# Altium PCB Powerboard_SAUVC26.PcbDoc (part 1 of 2)
Units mm, origin at the board's own origin, x right, y up, seen from the top; angles counter-clockwise.
Board outline 106 x 105.68 mm, 4 copper layers (Top Layer, Layer 1, Layer 2, Bottom Layer), stack 2.288 mm thick; 93 components, 65 nets, 427 pads, 430 vias.
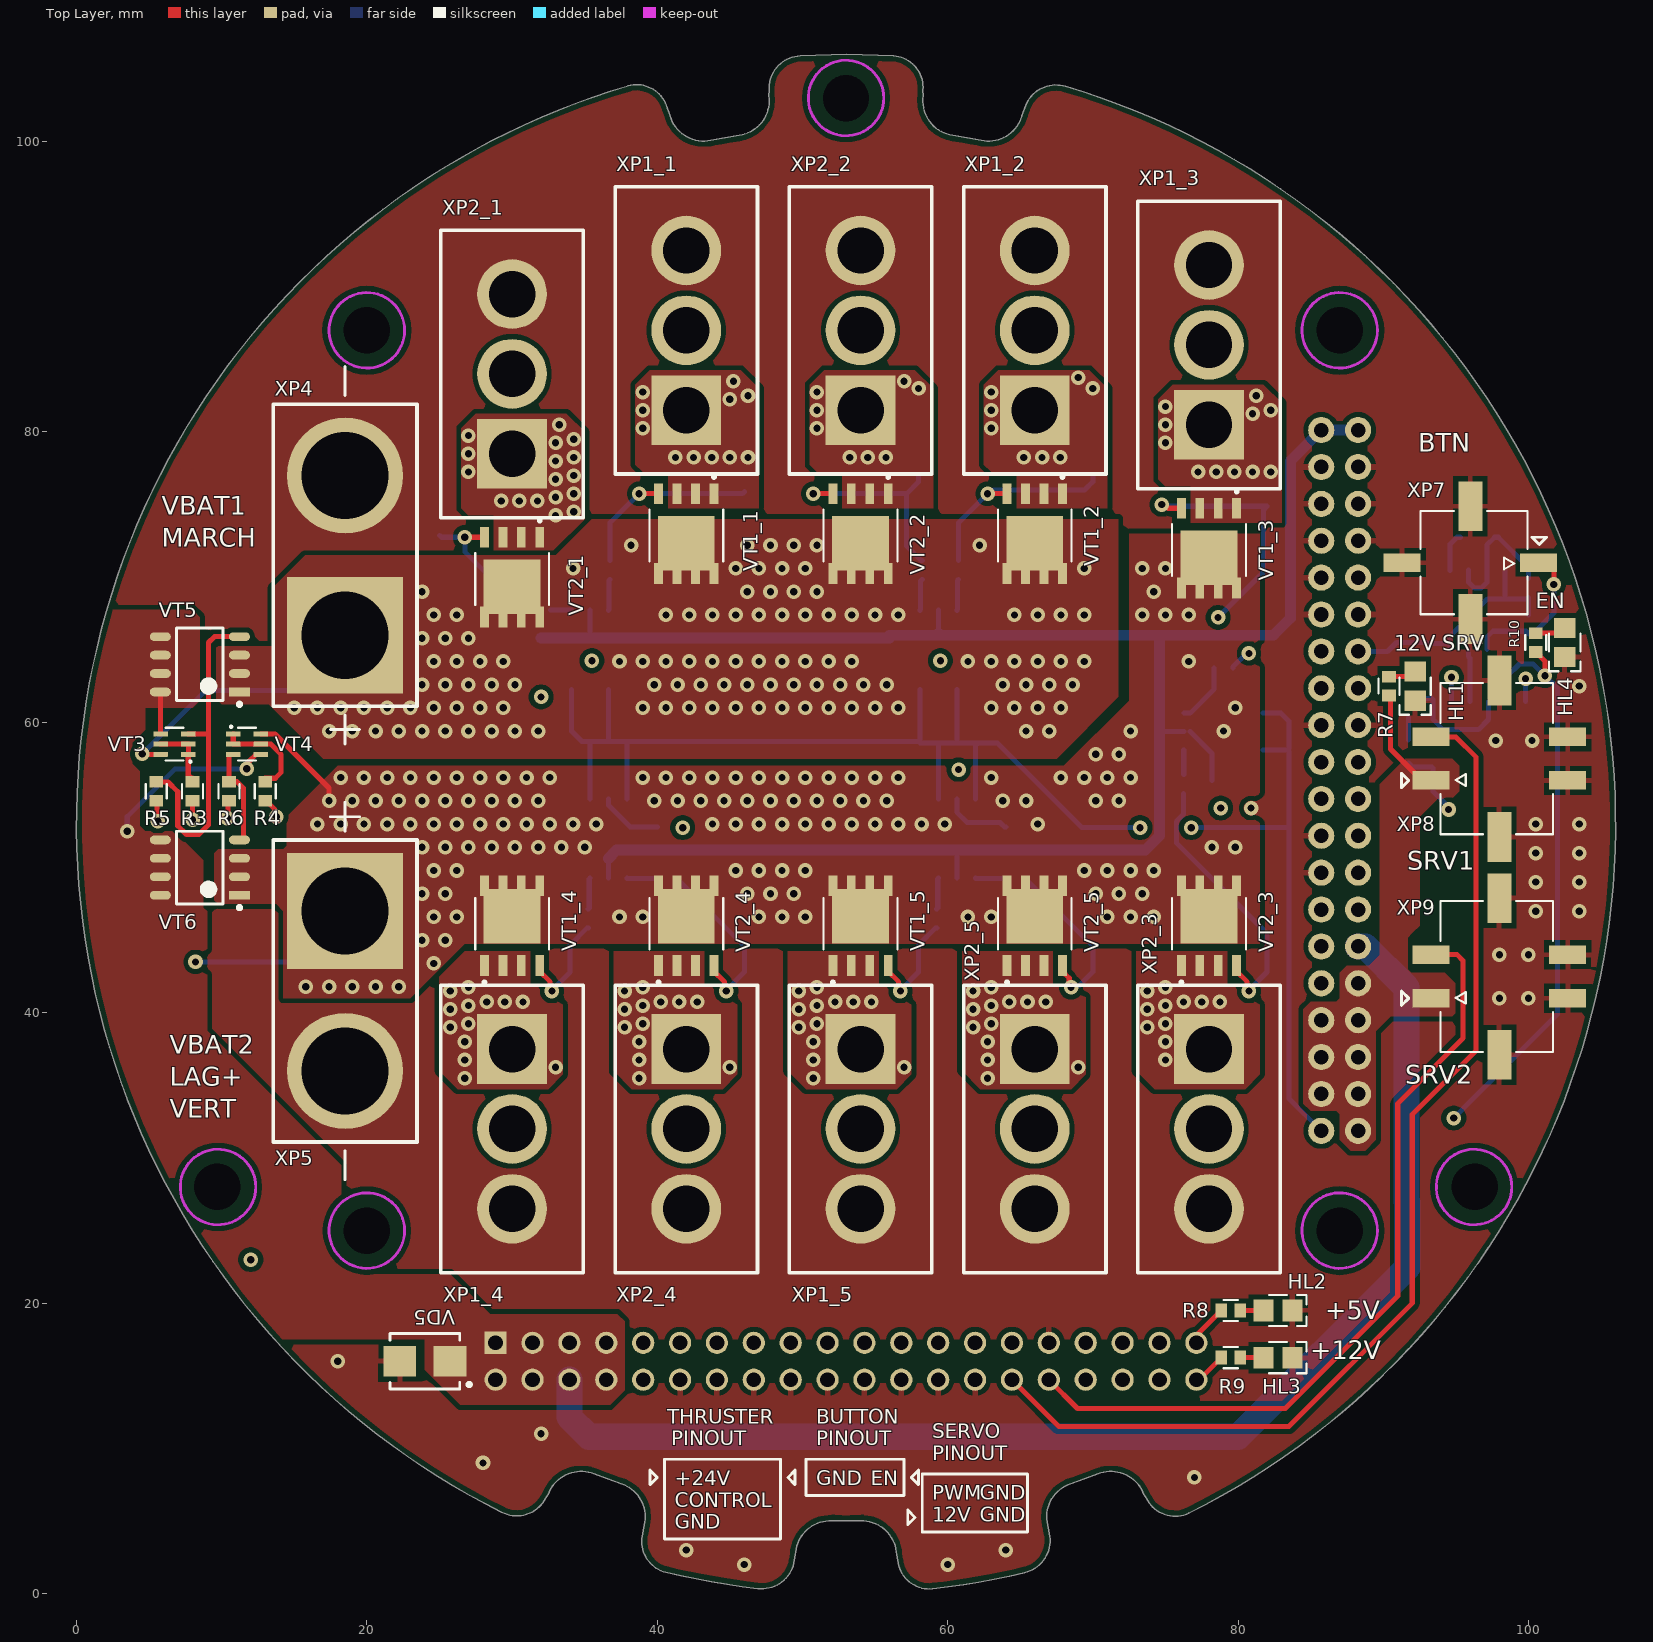
[diagram p0: Top Layer view]
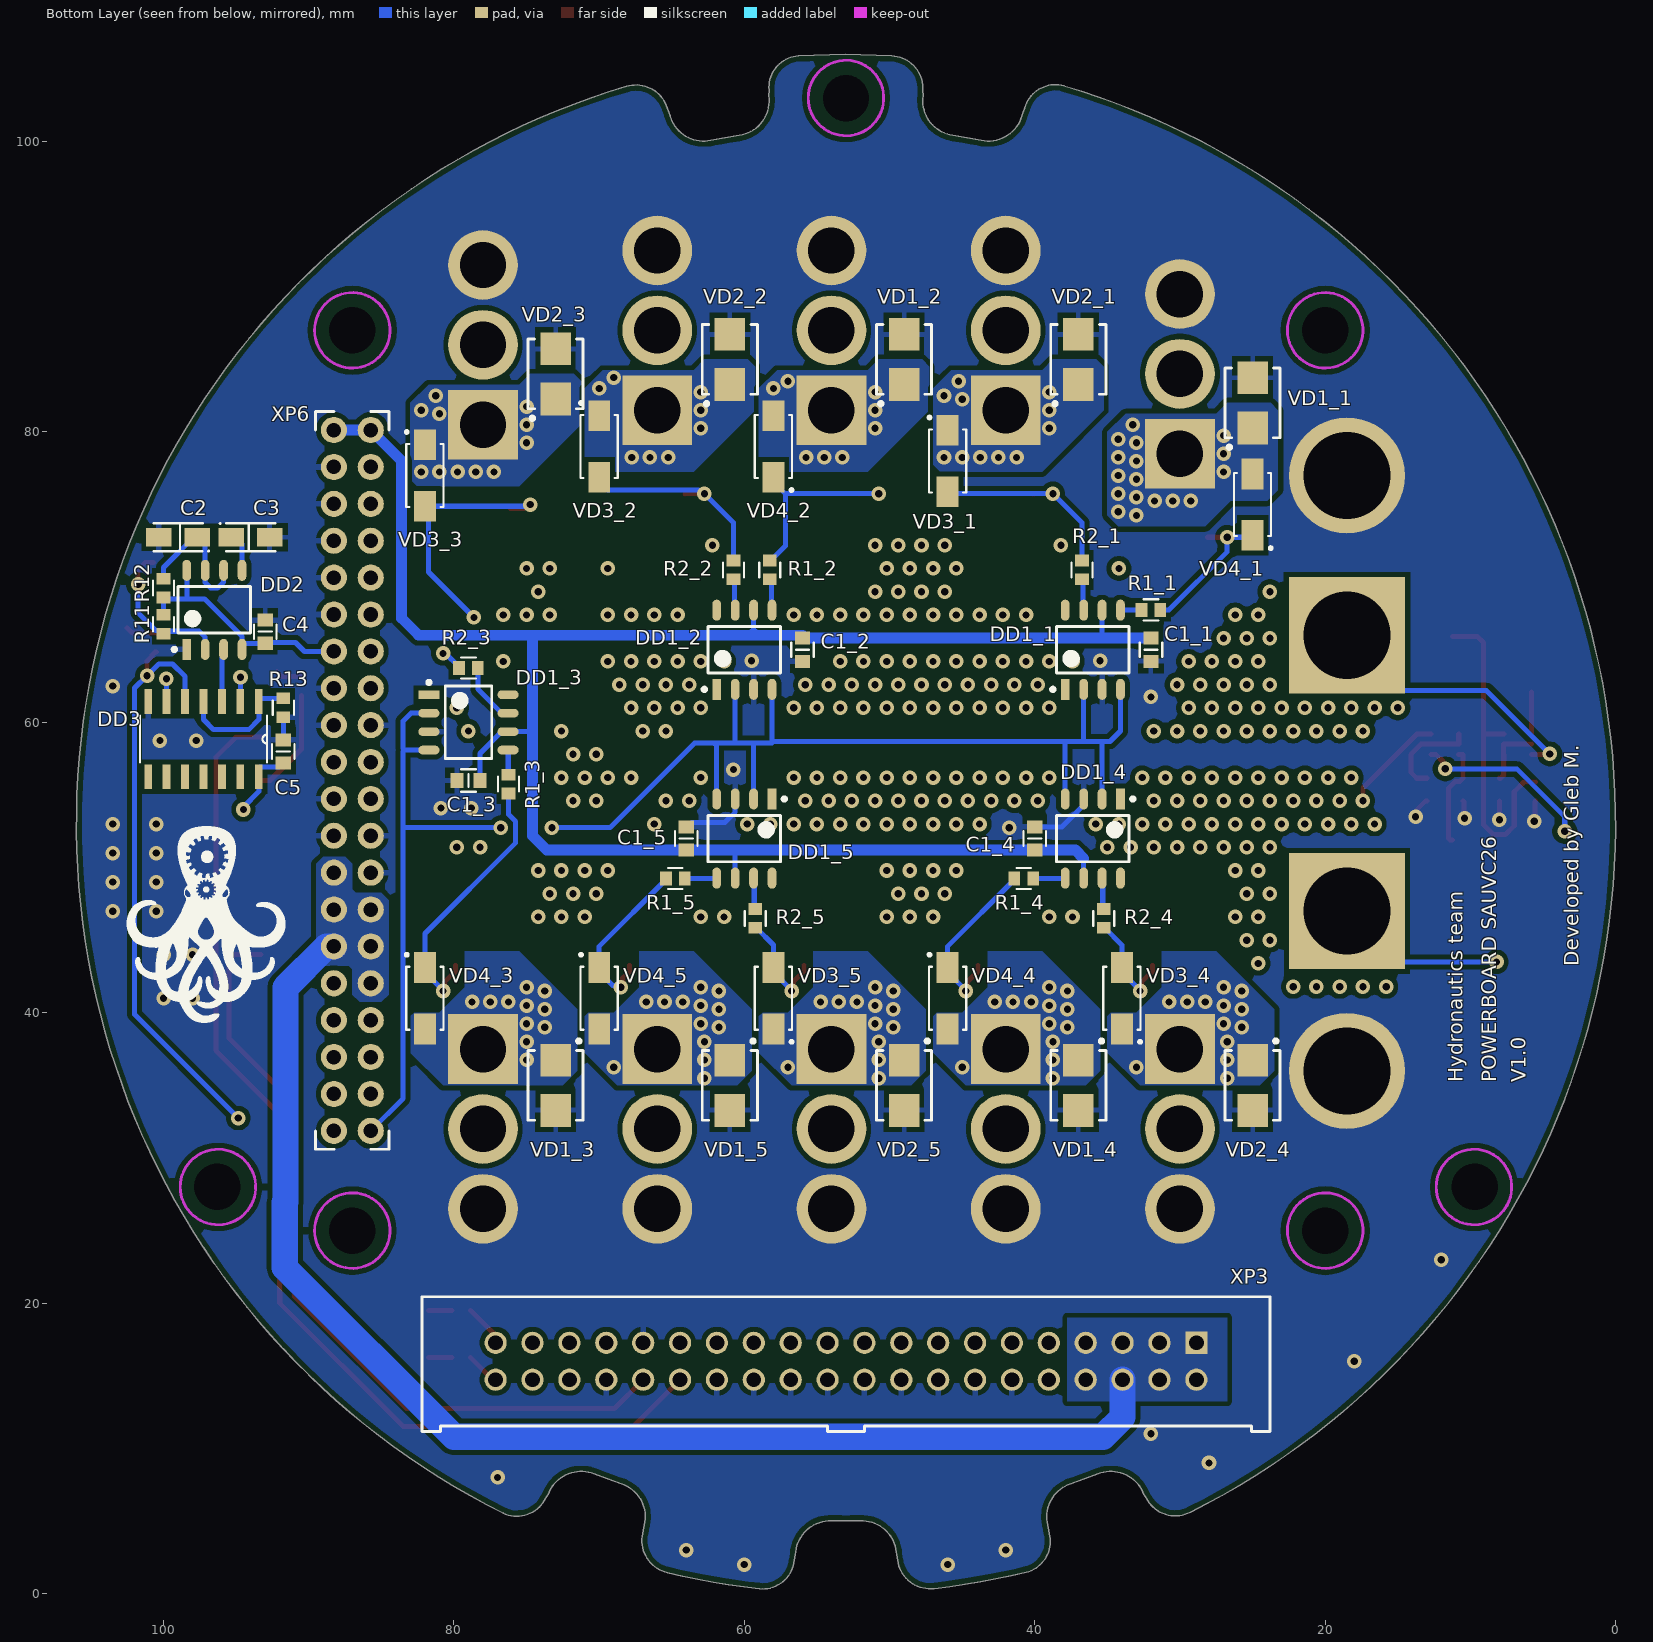
[diagram p1: Bottom Layer view, seen from below]
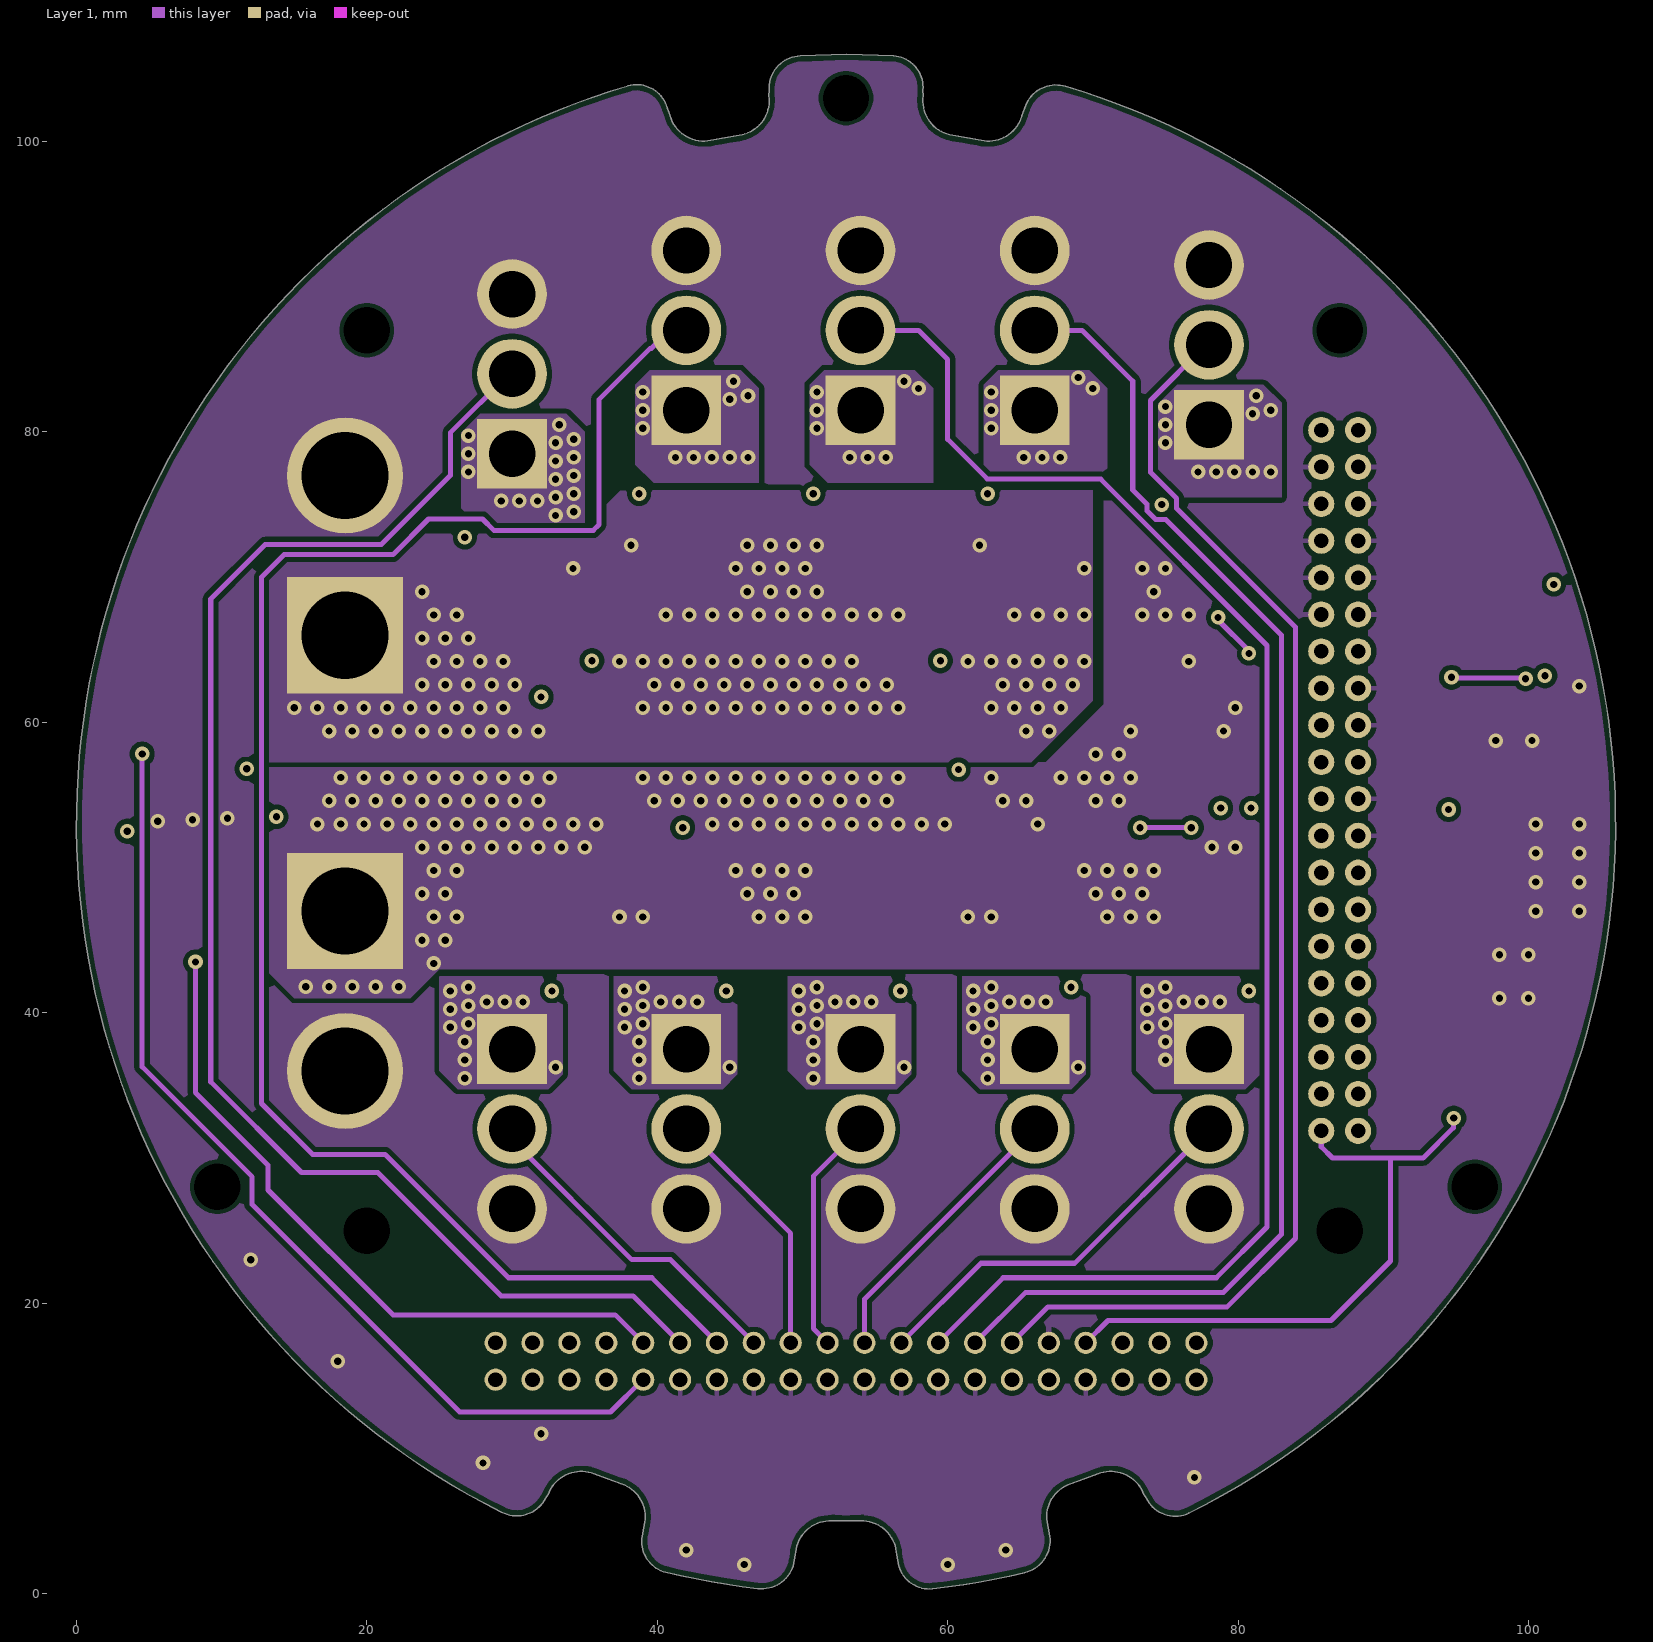
[diagram p2: Layer 1]
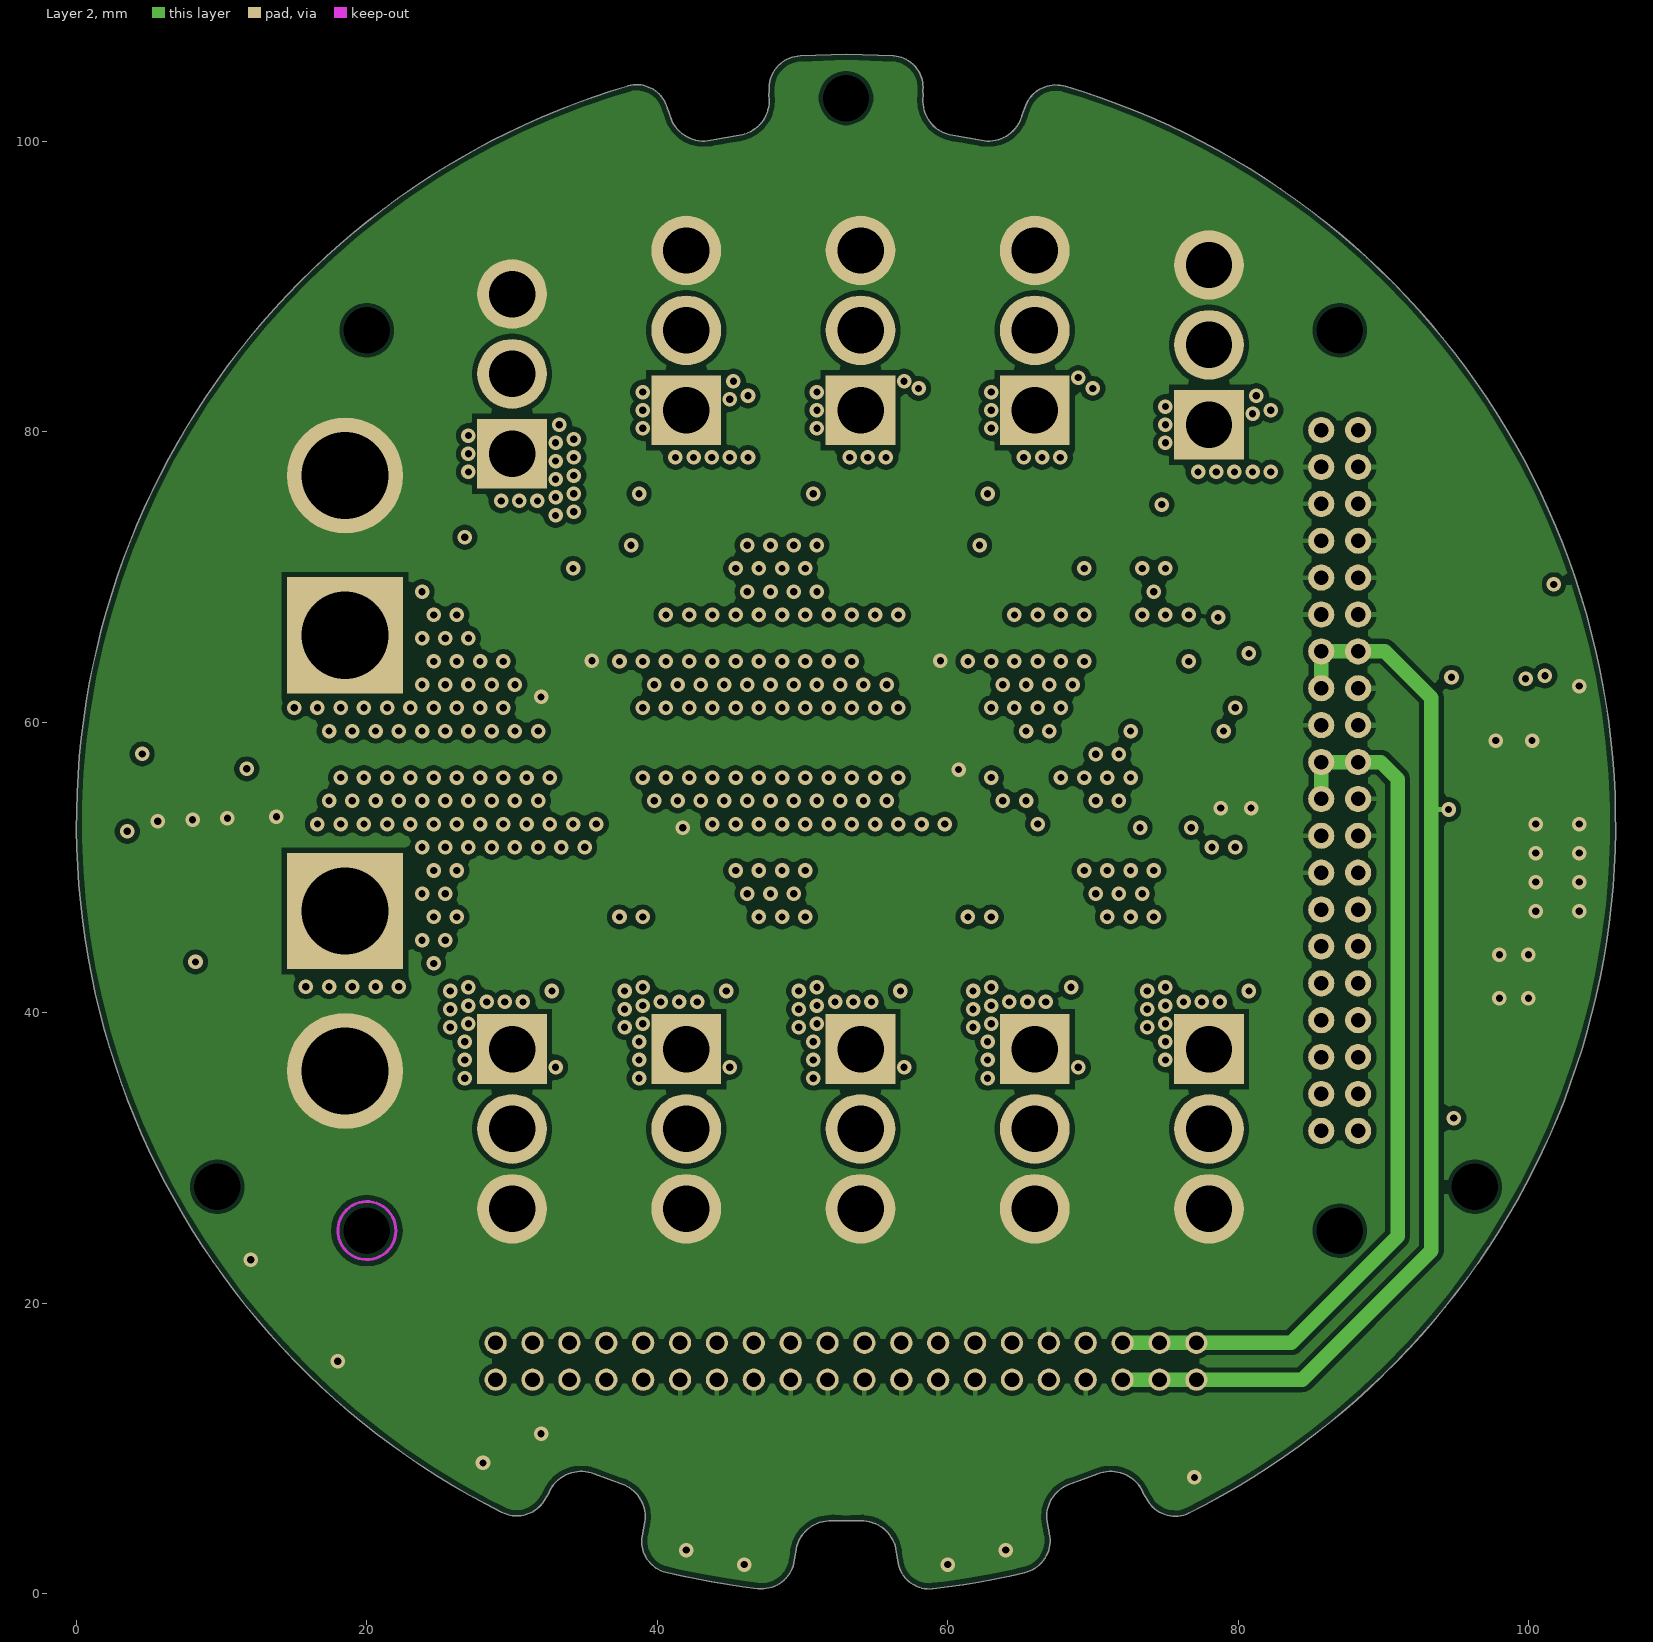
[diagram p3: Layer 2]
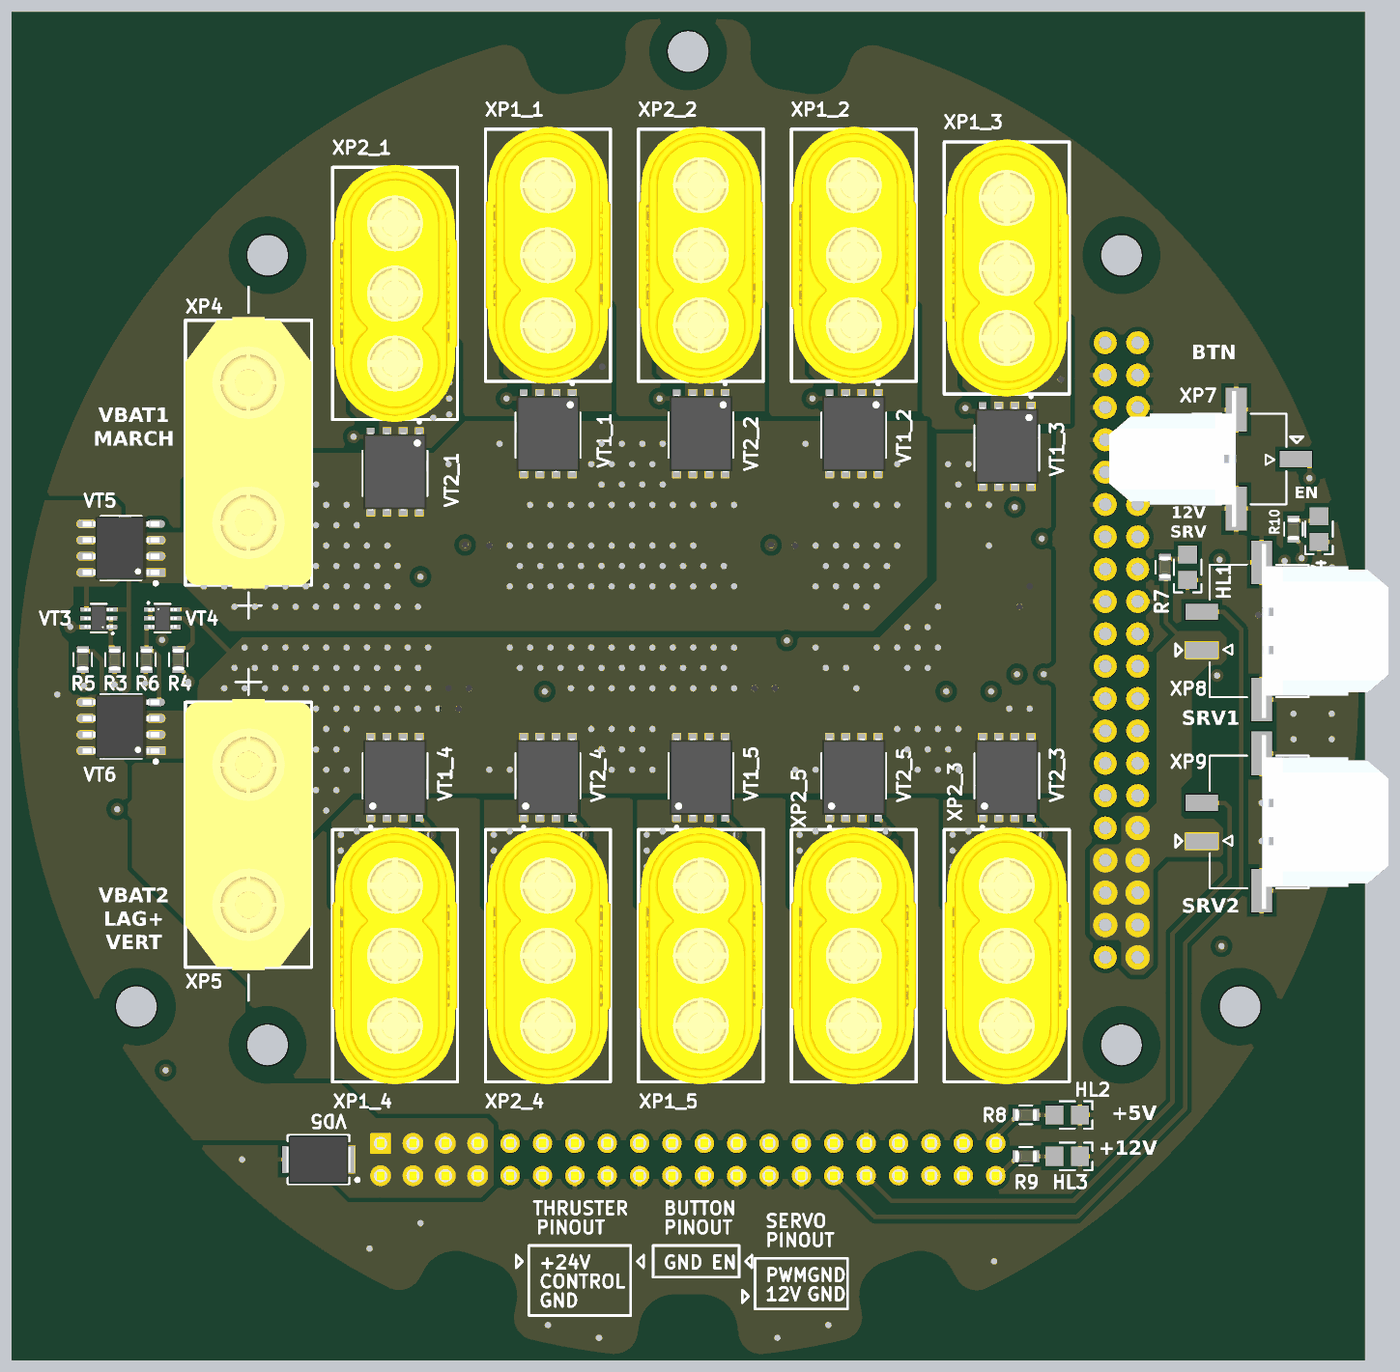
[diagram p5: 3D render of the assembled board from above, using the file's embedded part models]
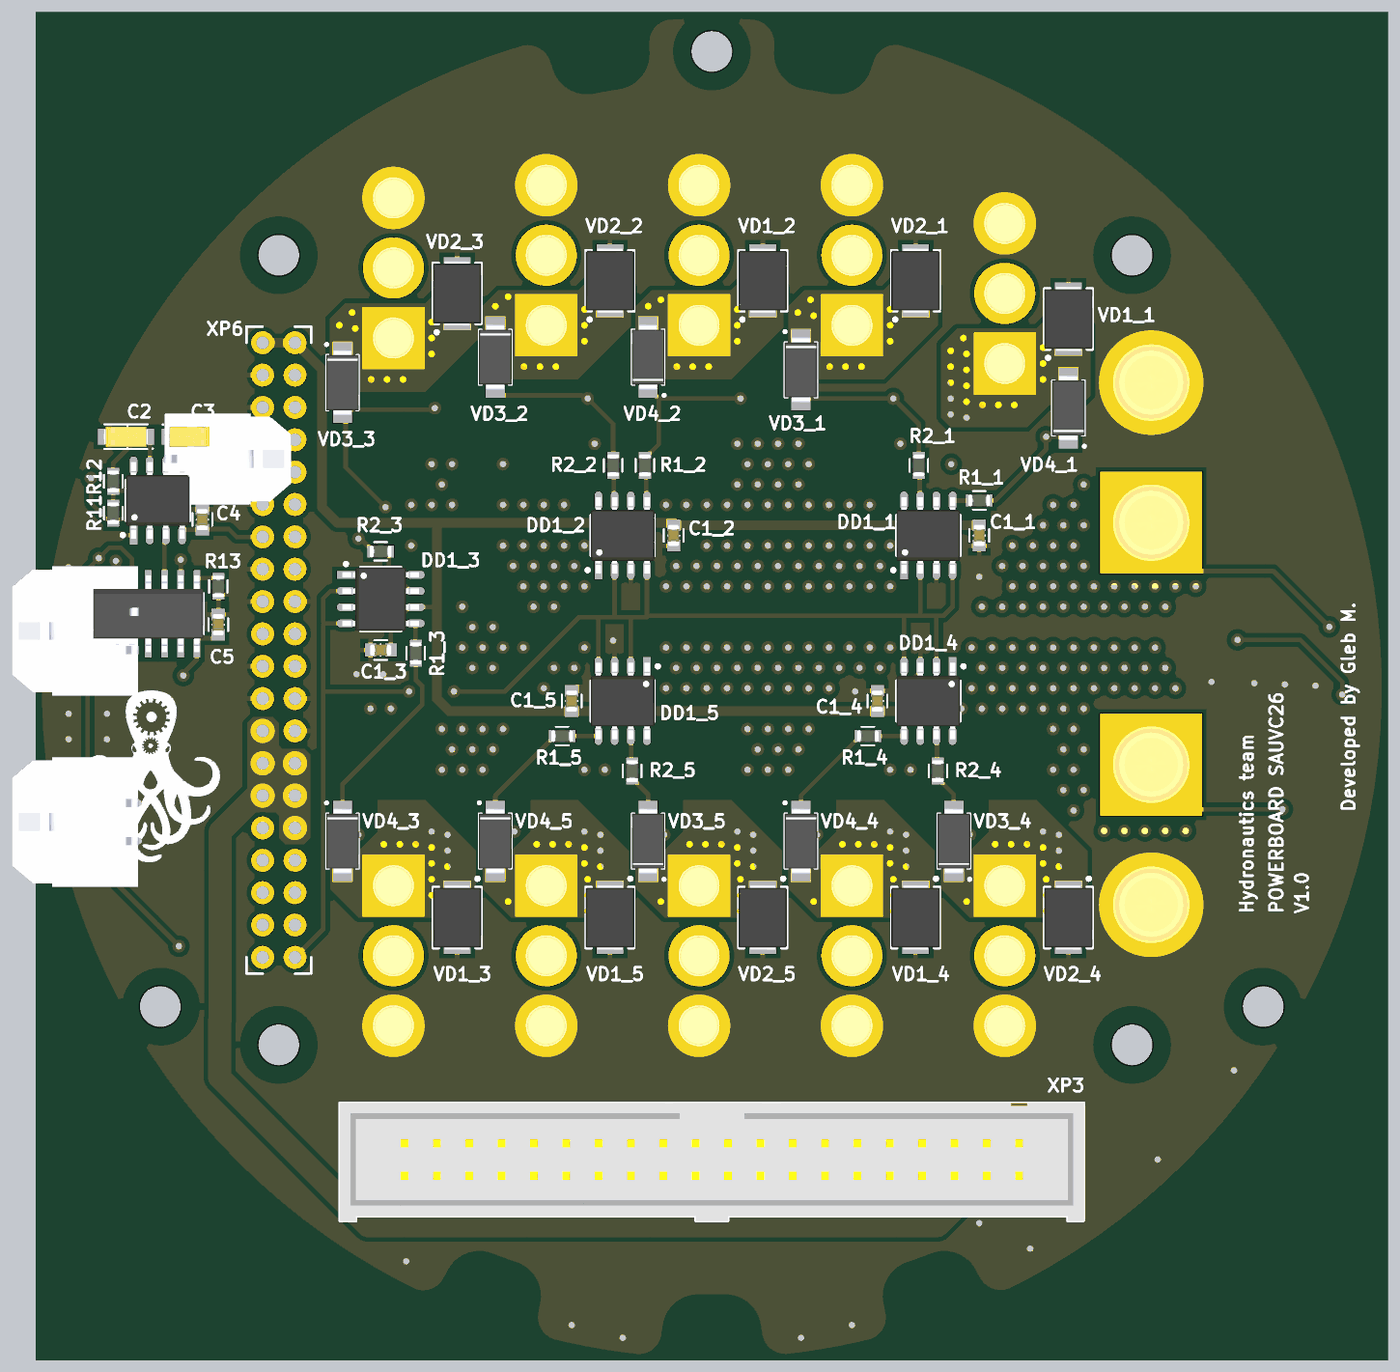
[diagram p6: 3D render of the assembled board from below, using the file's embedded part models]

## Layer stack, top to bottom
Top Solder: solder mask 0.0102, Solder Resist, Dk 3.5
Top Layer: signal copper 0.105
Dielectric 4: prepreg 0.193, FR4, Dk 4.6
Dielectric 6: prepreg 0.193, FR4, Dk 4.6
Dielectric 2: prepreg 0.193, FR4, Dk 4.6
Layer 1: signal copper 0.105
Dielectric 1: core 0.71, FR4, Dk 4.6
Layer 2: signal copper 0.105
Dielectric 3: prepreg 0.193, FR4, Dk 4.6
Dielectric 7: prepreg 0.193, FR4, Dk 4.6
Dielectric 5: prepreg 0.193, FR4, Dk 4.6
Bottom Layer: signal copper 0.105
Bottom Solder: solder mask 0.0102, Solder Resist, Dk 3.5

## Board outline
29.284,5.602 ccw(c30.316,7.601) 32.315,6.569 32.52,6.906 cw(c34.754,6.013) 35.647,8.246 ccw(c53.002,53.005) 37.526,7.563 cw(c36.774,5.278) 39.059,4.526 39,4.137 ccw(c41.13,3.594) 40.588,1.464 40.59,1.473 ccw(c53,53) 46.925,0.349 ccw(c47.211,2.581) 49.443,2.294 49.521,2.681 cw(c51.925,2.606) 52,5.01 ccw(c53,52.997) 54,5.01 cw(c54.075,2.606) 56.479,2.681 56.556,2.295 ccw(c58.744,2.514) 58.963,0.327 58.962,0.336 ccw(c53,53) 65.299,1.447 ccw(c64.805,3.642) 67,4.136 66.94,4.526 cw(c69.226,5.277) 68.474,7.563 ccw(c53,53.001) 70.353,8.246 cw(c71.246,6.013) 73.479,6.906 73.684,6.569 ccw(c75.665,7.523) 76.619,5.543 76.614,5.551 ccw(c53,53) 68.125,103.796 ccw(c67.456,101.648) 65.308,102.318 65.164,101.95 cw(c62.81,102.442) 62.318,100.087 ccw(c53.001,53.005) 60.349,100.434 cw(c60.692,102.815) 58.312,103.158 58.302,103.552 ccw(c56.11,103.716) 56.274,105.908 56.274,105.899 ccw(c53,53.001) 49.84,105.906 ccw(c49.946,103.658) 47.698,103.553 47.689,103.159 cw(c45.308,102.815) 45.651,100.434 ccw(c52.999,53.004) 43.682,100.087 cw(c43.191,102.441) 40.836,101.95 40.693,102.317 ccw(c38.577,101.721) 37.981,103.837 37.984,103.828 ccw(c53,53)

## Design rules (kind name [scope] priority, off if disabled: settings)
AcuteAngle [All] p1: minimum=3.50000000000000E+0001 checktracksonly=FALSE
BoardOutlineClearance "BoardOutlineClearance 2" [All] p1: gap=0.4 ignorepadtopadclearanceinfootprint=FALSE except(0: Arc-SplitContinuation Track-SplitContinuation SMDPad-SplitContinuation THPad-SplitContinuation Via-SplitContinuation Fill-SplitContinuation Poly-SplitContinuation Region-SplitContinuation Text-SplitContinuation) // V-Cut
Clearance "Clearance 3 Oz" [All] p1: gap=0.35 ignorepadtopadclearanceinfootprint=FALSE except(0.26: Arc-Hole Track-Hole SMDPad-Hole THPad-Hole Via-Hole Fill-Hole Poly-Hole Region-Hole Text-Hole)
HoleSize "Minimum HoleSize" [IsPad] p1: absolutevalues=TRUE maxlimit=8 minlimit=0.6 maxpercent=80.000 minpercent=20.000
HoleSize "Minimum HoleSize VIA 1" [IsVia] p2: absolutevalues=TRUE maxlimit=5.9 minlimit=0.3 maxpercent=80.000 minpercent=20.000 // Standart
HoleToHoleClearance Hole2HoleClearance [All] p1: gap=0.25 allowstackedmicrovias=FALSE
MinimumAnnularRing "Minimum AR VIA Standart" [IsVia] p1: minimumring=0.15
MinimumAnnularRing "Minimum AR PAD Standart" [IsPAD] p2: minimumring=0.2
MinimumAnnularRing "Minimum AR VIA Advance" [IsVia] p3: minimumring=0.1
MinimumAnnularRing "Minimum AR PAD Advance" [IsPAD] p4: minimumring=0.15
MinimumSolderMaskSliver "SolderMask Bridge Standart" [All] p1: minsoldermaskwidth=0.15 // All Masks
PlaneClearance "PlaneClearance 3 Oz" [All] p1: clearance=0.35
PlaneConnect "TermalConnect 3 Oz" [All] p1: planeconnectstyle=Relief reliefexpansion=0.2 reliefentries=4 reliefconductorwidth=0.35 reliefairgap=0.35 // Standart
PolygonConnect Thermal_relief [InNet('GND')] p1: thpad.connectstyle=Relief thpad.reliefconductorwidth=0.35 thpad.reliefentries=4 thpad.polygonreliefangle="90 Angle" thpad.airgapwidth=0.35 smdpad.connectstyle=Relief smdpad.reliefconductorwidth=0.35 smdpad.reliefentries=4 smdpad.polygonreliefangle="90 Angle" smdpad.airgapwidth=0.35 via.connectstyle=Direct via.reliefconductorwidth=0.254 via.reliefentries=4 via.polygonreliefangle="90 Angle" via.airgapwidth=0.254
PolygonConnect Direct [All] p2: connectstyle=Direct reliefconductorwidth=0.254 reliefentries=4 polygonreliefangle="90 Angle" airgapwidth=0.254
RoutingCorners [All] p1 off: cornerstyle=45-Degree minsetback=2.54 maxsetback=2.54
RoutingVias [All] p1: holewidth=0.5 width=1 viastyle="Through Hole" minholewidth=0.3 minwidth=0.6 maxholewidth=8 maxwidth=7
SilkToSilkClearance Silk2SilkClearance [All] p1 off: silktosilkclearance=0.15
SilkToSolderMaskClearance Silk2SolderMaskClearance [IsPad] p1: minsilkscreentomaskgap=0.15 clearancetoexposedcopper=TRUE
SolderMaskExpansion "SolderMaskExpansion LDI" [IsVia] p1: expansion=0.025 istentingtop=TRUE // Advance
SolderMaskExpansion [All] p2: expansion=0.05 istentingtop=FALSE
SupplyNets "Schematic Supply Nets_10" [InNet('+16В_АКБ2')] p1: voltage=0.000
SupplyNets "Schematic Supply Nets_9" [InNet('+16В')] p2: voltage=0.000
SupplyNets "Schematic Supply Nets_8" [InNet('+16В_АКБ1')] p3: voltage=0.000
SupplyNets "Schematic Supply Nets_7" [InNet('GND')] p4: voltage=0.000
SupplyNets "Schematic Supply Nets_5" [InNet('+5В')] p5: voltage=0.000
SupplyNets "Schematic Supply Nets_4" [InNet('+12В_servo')] p6: voltage=0.000
SupplyNets "Schematic Supply Nets_1" [InNet('+12В')] p7: voltage=0.000
SupplyNets "Schematic Supply Nets" [InNet('+35В')] p8: voltage=0.000
UnRoutedNet [All] p1: checkbadconnections=TRUE
Width "Width 3 Oz" [All] p1: maxlimit=10 minlimit=0.35 preferedwidth=0.4 checkconnectedcopper=TRUE
21 further rules are at their usual default settings.

## Classes and differential pairs
component class 3: C1_3 DD1_3 R1_3 R2_3 VD1_3 VD2_3 VD3_3 VD4_3 VT1_3 VT2_3 XP1_3 XP2_3
net class DSHOT2_[1..5]: DSHOT2_1 DSHOT2_2 DSHOT2_3 DSHOT2_4 DSHOT2_5
net class DSHOT1_[1..5]: DSHOT1_1 DSHOT1_2 DSHOT1_3 DSHOT1_4 DSHOT1_5
channel class Transistors: 1 2 3 4 5
component class 5: C1_5 DD1_5 R1_5 R2_5 VD1_5 VD2_5 VD3_5 VD4_5 VT1_5 VT2_5 XP1_5 XP2_5
component class 4: C1_4 DD1_4 R1_4 R2_4 VD1_4 VD2_4 VD3_4 VD4_4 VT1_4 VT2_4 XP1_4 XP2_4
component class 2: C1_2 DD1_2 R1_2 R2_2 VD1_2 VD2_2 VD3_2 VD4_2 VT1_2 VT2_2 XP1_2 XP2_2
component class 1: C1_1 DD1_1 R1_1 R2_1 VD1_1 VD2_1 VD3_1 VD4_1 VT1_1 VT2_1 XP1_1 XP2_1
component class KillSwitch: C2 C3 C4 C5 DD2 DD3 R11 R12 R13
component class Connectors: 32 HL1 HL2 HL3 HL4 R3 R4 R5 R6 R7 R8 R9 R10 VD5 VT3 VT4 VT5 VT6 XP3 XP4 XP5 XP6 XP7 XP8 XP9

## Components (designator, comment, footprint, x,y, rotation, side; value= is the part's Value field where it differs from the comment)
C1_1 "Capacitor" 0603C 32,65 r90 bottom value="0,1 мк" (schematic designator C1)
C1_2 "Capacitor" 0603C 56,65 r90 bottom value="0,1 мк" (schematic designator C1)
C1_3 "Capacitor" 0603C 79,56 r180 bottom value="0,1 мк" (schematic designator C1)
C1_4 "Capacitor" 0603C 40,52 r270 bottom value="0,1 мк" (schematic designator C1)
C1_5 "Capacitor" 0603C 64,52 r270 bottom value="0,1 мк" (schematic designator C1)
C2 "Capacitor" TC_A 99,72.75 r0 bottom value="22 мк"
C3 "Capacitor" TC_A 94,72.75 r180 bottom value="10 мк"
C4 "Capacitor" 0603C 93,66.25 r270 bottom value="0,1 мк"
C5 "Capacitor" 0603C 91.75,58 r90 bottom value="0,1 мк"
DD1_1 "IXDN602" SOIC-8 36,65 r90 bottom (schematic designator DD1)
DD1_2 "IXDN602" SOIC-8 60,65 r90 bottom (schematic designator DD1)
DD1_3 "IXDN602" SOIC-8 79,60 r180 bottom (schematic designator DD1)
DD1_4 "IXDN602" SOIC-8 36,52 r270 bottom (schematic designator DD1)
DD1_5 "IXDN602" SOIC-8 60,52 r270 bottom (schematic designator DD1)
DD2 "LMC555" SOIC-8 96.5,67.75 r90 bottom
DD3 "74HC74D,653" SOIC-14 97.25,58.85 r270 bottom
HL1 "LED" 0805D 92.2,62.5 r270 top
HL2 "LED" 0805D 82.75,19.5 r0 top
HL3 "LED" 0805D 82.75,16.25 r0 top
HL4 "LED" 0805D 102.5,65.5 r270 top
R1_1 "Resistor" 0603R 32,67.75 r180 bottom value=15 (schematic designator R1)
R1_2 "Resistor" 0603R 58.25,70.5 r90 bottom value=15 (schematic designator R1)
R1_3 "Resistor" 0603R 76.25,55.75 r270 bottom value=15 (schematic designator R1)
R1_4 "Resistor" 0603R 40.75,49.25 r0 bottom value=15 (schematic designator R1)
R1_5 "Resistor" 0603R 64.75,49.25 r0 bottom value=15 (schematic designator R1)
R2_1 "Resistor" 0603R 36.75,70.5 r90 bottom value=15 (schematic designator R2)
R2_2 "Resistor" 0603R 60.75,70.5 r90 bottom value=15 (schematic designator R2)
R2_3 "Resistor" 0603R 79,63.75 r0 bottom value=15 (schematic designator R2)
R2_4 "Resistor" 0603R 35.25,46.5 r270 bottom value=15 (schematic designator R2)
R2_5 "Resistor" 0603R 59.25,46.5 r270 bottom value=15 (schematic designator R2)
R3 "Resistor" 0603R 8,55.25 r90 top value="33 к"
R4 "Resistor" 0603R 13,55.25 r90 top value="33 к"
R5 "Resistor" 0603R 5.5,55.25 r90 top value="33 к"
R6 "Resistor" 0603R 10.5,55.25 r90 top value="33 к"
R7 "Resistor" 0603R 90.4,62.5 r270 top value="10 к"
R8 "Resistor" 0603R 79.5,19.5 r180 top value="10 к"
R9 "Resistor" 0603R 79.5,16.25 r180 top value="2,2 к"
R10 "Resistor" 0603R 100.5,65.5 r270 top value="2,2 к"
R11 "Resistor" 0603R 100,66.75 r90 bottom value="10 к"
R12 "Resistor" 0603R 100,69.25 r270 bottom value="10 к"
R13 "Resistor" 0603R 91.75,61 r90 bottom value="10 к"
VD1_1 "SMBJ16A" SMB 25,82 r90 bottom value="16 В" (schematic designator VD1)
VD1_2 "SMBJ16A" SMB 49,85 r90 bottom value="16 В" (schematic designator VD1)
VD1_3 "SMBJ16A" SMB 73,35 r270 bottom value="16 В" (schematic designator VD1)
VD1_4 "SMBJ16A" SMB 37,35 r270 bottom value="16 В" (schematic designator VD1)
VD1_5 "SMBJ16A" SMB 61,35 r270 bottom value="16 В" (schematic designator VD1)
VD2_1 "SMBJ16A" SMB 37,85 r90 bottom value="16 В" (schematic designator VD2)
VD2_2 "SMBJ16A" SMB 61,85 r90 bottom value="16 В" (schematic designator VD2)
VD2_3 "SMBJ16A" SMB 73,84 r90 bottom value="16 В" (schematic designator VD2)
VD2_4 "SMBJ16A" SMB 25,35 r270 bottom value="16 В" (schematic designator VD2)
VD2_5 "SMBJ16A" SMB 49,35 r270 bottom value="16 В" (schematic designator VD2)
VD3_1 "SMAJ12CA" SMA 46,78 r270 bottom value="12 В" (schematic designator VD3)
VD3_2 "SMAJ12CA" SMA 70,79 r270 bottom value="12 В" (schematic designator VD3)
VD3_3 "SMAJ12CA" SMA 82,77 r270 bottom value="12 В" (schematic designator VD3)
VD3_4 "SMAJ12CA" SMA 34,41 r90 bottom value="12 В" (schematic designator VD3)
VD3_5 "SMAJ12CA" SMA 58,41 r90 bottom value="12 В" (schematic designator VD3)
VD4_1 "SMAJ12CA" SMA 25,75 r90 bottom value="12 В" (schematic designator VD4)
VD4_2 "SMAJ12CA" SMA 58,79 r90 bottom value="12 В" (schematic designator VD4)
VD4_3 "SMAJ12CA" SMA 82,41 r270 bottom value="12 В" (schematic designator VD4)
VD4_4 "SMAJ12CA" SMA 46,41 r270 bottom value="12 В" (schematic designator VD4)
VD4_5 "SMAJ12CA" SMA 70,41 r270 bottom value="12 В" (schematic designator VD4)
VD5 "SMBJ16A" SMB 24,16 r180 top value="16 В"
VT1_1 "IRFH7084" PQFN_5x6 42,73 r270 top (schematic designator VT1)
VT1_2 "IRFH7084" PQFN_5x6 66,73 r270 top (schematic designator VT1)
VT1_3 "IRFH7084" PQFN_5x6 78,72 r270 top (schematic designator VT1)
VT1_4 "IRFH7084" PQFN_5x6 30,46 r90 top (schematic designator VT1)
VT1_5 "IRFH7084" PQFN_5x6 54,46 r90 top (schematic designator VT1)
VT2_1 "IRFH7084" PQFN_5x6 30,70 r270 top (schematic designator VT2)
VT2_2 "IRFH7084" PQFN_5x6 54,73 r270 top (schematic designator VT2)
VT2_3 "IRFH7084" PQFN_5x6 78,46 r90 top (schematic designator VT2)
VT2_4 "IRFH7084" PQFN_5x6 42,46 r90 top (schematic designator VT2)
VT2_5 "IRFH7084" PQFN_5x6 66,46 r90 top (schematic designator VT2)
VT3 "BC857BS" SOT-363_35um 6.75,58.5 r180 top
VT4 "BC857BS" SOT-363_35um 11.75,58.5 r0 top
VT5 "IRF9310TR" SOIC-8 8.5,64 r180 top
VT6 "IRF9310TR" SOIC-8 8.5,50 r180 top
XP1_1 "MR60PB-M" MR60PB-M 42,87 r270 top (schematic designator XP1)
XP1_2 "MR60PB-M" MR60PB-M 66,87 r270 top (schematic designator XP1)
XP1_3 "MR60PB-M" MR60PB-M 78,86 r270 top (schematic designator XP1)
XP1_4 "MR60PB-M" MR60PB-M 30,32 r90 top (schematic designator XP1)
XP1_5 "MR60PB-M" MR60PB-M 54,32 r90 top (schematic designator XP1)
XP2_1 "MR60PB-M" MR60PB-M 30,84 r270 top (schematic designator XP2)
XP2_2 "MR60PB-M" MR60PB-M 54,87 r270 top (schematic designator XP2)
XP2_3 "MR60PB-M" MR60PB-M 78,32 r90 top (schematic designator XP2)
XP2_4 "MR60PB-M" MR60PB-M 42,32 r90 top (schematic designator XP2)
XP2_5 "MR60PB-M" MR60PB-M 66,32 r90 top (schematic designator XP2)
XP3 "IDC_40_Male conector" "IDC_40_Male conector" 53,16 r0 bottom
XP4 "XT90PB-M" XT90PB-M 18.5,71 r90 top
XP5 "XT90PB-M" XT90PB-M 18.5,42 r270 top
XP6 "PBD-40" DCDC_SAUVC26 87,56 r270 bottom
XP7 "430450218" Molex_430450218 96,71 r90 top
XP8 "430450418" MOLEX_430450418 98,57.5 r270 top
XP9 "430450418" MOLEX_430450418 98,42.5 r270 top

## Footprints (in the part's own frame and the unit in brackets; to place one, negate y for a bottom-side part, rotate by r counter-clockwise, add the part's x,y. Pads: shape width x height; smd on the part's side, far side on the other; paste and mask are expansions set on the pad)
0603C [mm] "Chip Resistor, 2-Leads, Body 1,40x0,80mm, IPC Medium Density"
  rect 0.9x1.05 smd: 1(-0.8,0) 2(0.8,0)
  silkscreen extent -0.5,-0.77 0.5,0.77, body extent -0.85,-0.45 0.85,0.45, height 0.9
0603R [mm] "Chip Resistor, 2-Leads, Body 1.60x0.85mm, IPC Medium Density"
  rect 0.8x0.95 smd: 1(-0.65,0) 2(0.65,0)
  silkscreen extent -0.5,-0.72 0.5,0.72, body extent -0.87,-0.47 0.88,0.48, height 0.9
0805D [mm]
  rect 1.4x1.5 smd: 1(-1,0) 2(1,0)
  silkscreen extent -0.6,-1.07 1.97,1.07, body extent -1.07,-0.7 1.07,0.7, height 0.7
DCDC_SAUVC26 [mm]
  round 1.8 hole 1: 1(-24.13,1.27) 2(-24.13,-1.27) 3(-21.59,1.27) 4(-21.59,-1.27) 5(-19.05,1.27) 6(-19.05,-1.27) 7(-16.51,1.27) 8(-16.51,-1.27) 9(-13.97,1.27) 10(-13.97,-1.27) 11(-11.43,1.27) 12(-11.43,-1.27) 13(-8.89,1.27) 14(-8.89,-1.27) 15(-6.35,1.27) 16(-6.35,-1.27) 17(-3.81,1.27) 18(-3.81,-1.27) 19(-1.27,1.27) 20(-1.27,-1.27) 21(1.27,1.27) 22(1.27,-1.27) 23(3.81,1.27) 24(3.81,-1.27) 25(6.35,1.27) 26(6.35,-1.27) 27(8.89,1.27) 28(8.89,-1.27) 29(11.43,1.27) 30(11.43,-1.27) 31(13.97,1.27) 32(13.97,-1.27) 33(16.51,1.27) 34(16.51,-1.27) 35(19.05,1.27) 36(19.05,-1.27) 37(21.59,1.27) 38(21.59,-1.27) 39(24.13,1.27) 40(24.13,-1.27)
  round 0 hole 3.2 unplated mask+1.7: NC(-31,0) NC(-31,67) NC(31,0) NC(31,67)
  silkscreen extent -25.4,-2.54 25.4,2.54, body extent -35,-4 35,71, height 17.5
"IDC_40_Male conector" [mm] "Connector; IDC"
  rect 1.53x1.53 / inner round 1.53 / far side rect 1.53x1.53 hole 1.02: 1(-24.13,-1.27)
  round 1.53 hole 1.02: 2(-24.13,1.27) 3(-21.59,-1.27) 4(-21.59,1.27) 5(-19.05,-1.27) 6(-19.05,1.27) 7(-16.51,-1.27) 8(-16.51,1.27) 9(-13.97,-1.27) 10(-13.97,1.27) 11(-11.43,-1.27) 12(-11.43,1.27) 13(-8.89,-1.27) 14(-8.89,1.27) 15(-6.35,-1.27) 16(-6.35,1.27) 17(-3.81,-1.27) 18(-3.81,1.27) 19(-1.27,-1.27) 20(-1.27,1.27) 21(1.27,-1.27) 22(1.27,1.27) 23(3.81,-1.27) 24(3.81,1.27) 25(6.35,-1.27) 26(6.35,1.27) 27(8.89,-1.27) 28(8.89,1.27) 29(11.43,-1.27) 30(11.43,1.27) 31(13.97,-1.27) 32(13.97,1.27) 33(16.51,-1.27) 34(16.51,1.27) 35(19.05,-1.27) 36(19.05,1.27) 37(21.59,-1.27) 38(21.59,1.27) 39(24.13,-1.27) 40(24.13,1.27)
  silkscreen extent -29.21,-4.45 29.21,4.82, body extent -29.21,-4.45 29.21,4.83, height 8.89
Molex_430450218 [mm]
  rect 3.43x1.65 smd mask+0.076: 0(-3.885,0) 0(3.885,0)
  rect 1.27x2.54 smd mask+0.076: 1(0,-4.7) 2(0,4.7)
  silkscreen extent -3.56,-3.94 3.56,3.43, body extent -5.32,-5.6 5.33,5.6, height 9.96
MOLEX_430450418 [mm]
  rect 3.43x1.65 smd mask+0.076: 0(-5.385,0) 0(5.385,0)
  rect 1.27x2.54 smd mask+0.076: 1(1.5,-4.7) 2(-1.5,-4.7) 3(1.5,4.7) 4(-1.5,4.7)
  silkscreen extent -5.21,-4.06 5.21,3.68, body extent -6.82,-5.6 6.83,5.6, height 9.96
MR60PB-M [mm]
  rect 4.8x4.8 hole 3.2: 1(5.5,0)
  round 4.8 hole 3.2: 2(0,0) 3(-5.5,0)
  silkscreen extent -9.9,-4.9 9.9,4.9, body extent -10.1,-4.9 10.1,4.9, height 14.19
PQFN_5x6 [mm]
  rect 1.42x0.61 smd: 1(-2.745,1.905) 2(-2.745,0.635) 3(-2.745,-0.635) 4(-2.745,-1.905) 5(2.745,-1.905) 6(2.745,-0.635) 7(2.745,0.635) 8(2.745,1.905)
  rect 3.75x3.91 smd paste-3: 8(0.66,0)
  silkscreen extent -4,-2.54 1.91,2.54, body extent -3.04,-2.51 3.04,2.51, height 1.17
SMA [mm]
  rect 2.12x1.5 smd: 1(2.115,0) 2(-2.115,0)
  silkscreen extent -3.1,-1.35 2.16,1.28, body extent -2.57,-1.28 2.57,1.28, height 2.5
SMB [mm] "Diod"
  rect 2.25x2.1 smd: 1(1.725,0) 2(-1.725,0)
  silkscreen extent -3.17,-1.9 2.4,1.9, body extent -2.57,-1.9 2.57,1.9, height 2.4
SOIC-8 [mm] "for operational amplifier"
  rect 1.45x0.6 smd: 1(-2.725,1.905)
  oval 1.45x0.6 smd: 2(-2.725,0.635) 3(-2.725,-0.635) 4(-2.725,-1.905) 5(2.725,-1.905) 6(2.725,-0.635) 7(2.725,0.635) 8(2.725,1.905)
  silkscreen extent -2.85,-2.5 1.6,2.88, body extent -3,-2.5 3,2.5, height 1.75
SOIC-14 [mil]
  rect 67x21 smd: 1(-102,150) 2(-102,100) 3(-102,50) 4(-102,0) 5(-102,-50) 6(-102,-100) 7(-102,-150) 8(102,-150) 9(102,-100) 10(102,-50) 11(102,0) 12(102,50) 13(102,100) 14(102,150)
  silkscreen extent -63,-172 63,172, body extent -118,-170 118,170, height 69
SOT-363_35um [mm]
  rrect25% 1x0.35 smd: 1(-0.95,0.7) 2(-0.955,0) 3(-0.95,-0.7) 4(0.95,-0.7) 5(0.955,0) 6(0.95,0.7)
  silkscreen extent -1.18,-1.12 0.63,1.27, body extent -1.11,-1 1.11,1, height 1.1
TC_A [mm] "Tantalum capacitor, type A,  1 pin - plus"
  rect 1.75x1.25 smd: 1(-1.325,0) 2(1.325,0)
  silkscreen extent -2.15,-0.97 1.7,1, body extent -1.73,-0.8 1.73,0.8, height 1.64
XT90PB-M [mm]
  round 8 hole 6 mask+0.102: N(6,0)
  rect 8x8 hole 6 mask+0.102: P(-5,0)
  silkscreen extent -12.5,-4.95 13.5,4.95, body extent -10.15,-4.95 11.15,4.95, height 20.7

## Part data
C1_1 C1_2 C1_3 C1_4 C1_5 C4 C5: library part Capacitor_0,1u_10_50V_X7R_0603C, "Конденсатор", Capacity (nF)=100, Dielectric=X7R, Tolerance=0,1, Voltage (V)=50, Library Path2=Schematic\Capacitor.SchLib, Part Number=Capacitor_0,1u_10_50V_X7R_0603C
C2: library part Capacitor_22u_10_50V_TC_A, "Танталовый конденсатор", Capacity (uF)=22, Tolerance=0,1, Voltage (V)=50, Part Number=Capacitor_22u_10_50V_TC_A, Type=Tantalum
C3: library part Capacitor_10u_10_50V_TC_A, "Танталовый конденсатор", Capacity (uF)=10, Tolerance=0,1, Voltage (V)=50, Part Number=Capacitor_10u_10_50V_TC_A, Type=Tantalum
DD1_1 DD1_2 DD1_3 DD1_4 DD1_5: "Двухканальный драйвер затвора для mosfet и igbt транзисторов", Part Number=IXDN602
DD2: "Таймер интегральный прецизионный КМОП", Part Number=LMC555
DD3: "Два триггера D-типа", PACKAGE="SO14-14 Nexperia USA Inc.", Check_prices=https://www.snapeda.com/parts/74HC74D,653/Nexperia/view-part/?ref=eda, MF="Nexperia USA", MP=74HC74D,653, Part Number=74HC74D,653, SnapEDA_Link=https://www.snapeda.com/parts/74HC74D,653/Nexperia/view-part/?ref=snap
HL1 HL2 HL3 HL4: "Светодиод", Color={Цвет}, Part Number=LED
R1_1 R1_2 R1_3 R1_4 R1_5 R2_1 R2_2 R2_3 R2_4 R2_5: library part Resistor_15_1_0603, "Резистор номиналом 15 Ом 1%", Tolerance=1%, Part Number=Resistor_15_1_0603
R3 R4 R5 R6: library part Resistor_33k_1_0603, "Резистор номиналом 33 кОм и точностью 1%", Tolerance=1%, Part Number=Resistor_33k_1_0603
R7 R8 R11 R12 R13: library part Resistor_10k_1_0603, "Резистор номиналом 10 кОм и точностью 1%", Tolerance=1%, Part Number=Resistor_10k_1_0603
R9 R10: library part Resistor_2.2k_1_0603, "Резистор номиналом 2,2 кОм и точностью 1%", Tolerance=1%, Part Number=Resistor_2.2k_1_0603
VD1_1 VD1_2 VD1_3 VD1_4 VD1_5 VD2_1 VD2_2 VD2_3 VD2_4 VD2_5 VD5: "Защитный диод на 16 В, рассеиваемая мощность 600 Вт", Power (W)=600, Voltage nominal (V)=16, Part Number=SMBJ16A
  VD5: Автор=glebmih
VD3_1 VD3_2 VD3_3 VD3_4 VD3_5 VD4_1 VD4_2 VD4_3 VD4_4 VD4_5: "Защитный диод на 12 В, рассеиваемая мощность 400 Вт", Power (W)=400, Voltage nominal (V)=12, Part Number=SMAJ12CA
VT1_1 VT1_2 VT1_3 VT1_4 VT1_5 VT2_1 VT2_2 VT2_3 VT2_4 VT2_5: "N-канальный MOSFET", Current (A)="100 А", Voltage (V)="40 В", Part Number=IRFH7084
VT3 VT4: "Сборка из биполярных транзисторов, 2 pnp, 45 В,  0.1А", Current (A)="0.1 А", Voltage (V)="45 В", Part Number=BC857BS, Автор=glebmih
VT5 VT6: "P-канальный MOSFET, 30 В, 20 А", Current (A)="20 А", Voltage (V)="30 В", Part Number=IRF9310TR, Автор=glebmih
XP1_1 XP1_2 XP1_3 XP1_4 XP1_5 XP2_1 XP2_2 XP2_3 XP2_4 XP2_5: "60 А (40 продолжительно), 3 контакта, прямой отец", Value1={Value1}, Value2={Value2}, Value3={Value3}, Part Number=MR60PB-M, System=Connector
XP3: "IDC 40-пиновый разъём прямая вилка", Value1=+24В, Value5=АКБ2, Value6=DSHOT, Value16=GND, Value17=Enable, Value18=+12В, Part Number="IDC_40_Male conector", System=Connector, Value2=+24В, Value3=+24В, Value4=+24В, Value7=DSHOT, Value8=DSHOT, Value9=DSHOT, Value10=DSHOT, Value11=DSHOT, Value12=DSHOT, Value13=DSHOT, Value14=DSHOT, Value15=DSHOT, Value19=+12В, Value20=+12В
XP4: "90 А (60 продолжительно), 2 контакта, прямой отец", Value1=+АКБ1, Value2=общий, Part Number=XT90PB-M, System=Connector
XP5: "90 А (60 продолжительно), 2 контакта, прямой отец", Value1=+АКБ2, Value2=общий, Part Number=XT90PB-M, System=Connector
XP6: library part DCDC_SAUVC26, "Плата DCDC преобрахователей", Value1=+35В, Value2=GND, Value7=+5В, Value10=+12В, Value14=+24В, Value17=+12В_servo, Value20=Enable, Value3=GND, Value4=GND, Value5=GND, Value6=GND, Value8=+5В, Value9=GND, Value11=+12В, Value12=GND, Value13=GND, Value15=+24В, Value16=+24В, Value18=+12В_servo, Value19=+12В_servo
XP7: library part Molex_430450218, "Разъем типа провод-плата, 3 мм, 2 контакт(-ов), Штыревой Разъем, Серия Micro-Fit для поверхностного монтажа", Value1={Value1}, Value2={Value2}, Value3=Корпус, Part Number=Molex_430450218, System=Connector, Value4=Корпус
XP8 XP9: library part Molex_430450418, "Разъем типа провод-плата, 3 мм, 4 контакт(-ов), Штыревой Разъем, для поверностного монтажа", Value1={Value1}, Value2={Value2}, Value3={Value3}, Value4={Value4}, Part Number=Molex_430450418, System=Connector

## Free pads (board coordinates)
  round 0 hole 3.2 unplated mask+1.7: 7(9.706,28.007) 7(53,103) 7(96.309,28.007)

## Via types
v1: diameter 1, hole 0.5, Top Layer to Bottom Layer, tented both sides, 430 vias

## Nets (pads, with @x,y where several pads share a name; then routed paths per layer and width w, separated by ;. In a path a pad name is that pad's centre, name@x,y a point inside that pad or via, vN(x,y) a via of type N, cw(c..) or ccw(c..) an arc to the next point about the centre after c; other vN are vias at no path point)
+5В: C4.2 C5.1 DD2.4 DD2.8 DD3.14 R9.2 R11.2 R12.2 XP3.36 XP3.38 XP3.40 XP6.13 XP6.14 XP6.15 | length 100.6
  Top Layer w0.35: XP3.40@77.13,14.73 77.33,14.73 R9.2@78.85,16.25
  Layer 2 w0.35: 93.3,54 v1(94.5,54)
  Layer 2 w1: XP3.36@72.05,14.73 84.43,14.73 93.3,23.6 93.3,54 93.3,61.7 90.11,64.89 XP6.14@88.27,64.89 XP6.13@85.73,64.89 XP6.15@85.73,62.35
  Bottom Layer w0.35: XP6.14@88.279,64.881 90.3,64.881 90.919,65.5 92.95,65.5 93.005,65.445 94.48,65.445 94.595,65.33 DD2.4@94.595,65.025 94.595,65.925 97.18,68.51 98.39,68.51 ; C5.1@91.75,57.2 92.015,56.935 93.348,56.935 93.44,56.843 93.44,55.236 94.5,54.176 v1(94.5,54) ; DD2.8@98.39,70.46 98.39,68.51 ; R11.2@100,67.4 R12.2@100,68.6 99.91,68.51 98.39,68.51
+12В: R8.2 XP3.35 XP3.37 XP3.39 XP6.19 XP6.20 XP6.21 | length 64.7
  Top Layer w0.35: XP3.39@77.13,17.27 77.13,17.78 R8.2@78.85,19.5
  Layer 2 w1: XP3.35@72.05,17.27 XP3.39@77.13,17.27 83.67,17.27 91,24.6 91,56.1 89.83,57.27 XP6.20@88.27,57.27 XP6.19@85.73,57.27 XP6.21@85.73,54.73
+12В_servo: R7.2 XP6.32 XP6.33 XP6.34 XP6.35 XP6.36 XP6.37 XP6.38 XP6.40 XP8.1 XP9.1 | length 7.4
  Top Layer w0.35: R7.2@90.5,61.85 90.5,58.165 92.665,56 XP8.1@93.3,56
+16В: VD5.2 VT3.4 VT4.4 VT5.5 VT5.6 VT5.7 VT5.8 VT6.5 VT6.6 VT6.7 VT6.8 XP3.1 XP3.2 XP3.3 XP3.4 XP3.5 XP3.6 XP3.7 XP3.8 XP6.26 XP6.27 XP6.28 XP6.29 XP6.30 XP6.31 | length 104.6
  Top Layer w0.35: VT5.8@5.775,62.095 5.788,62.082 5.788,59.2 VT3.4@5.8,59.2 ; v1(11.725,56.8) 11.849,56.924 11.849,57.274 12.375,57.8 VT4.4@12.7,57.8
  Bottom Layer w0.35: v1(3.5,52.5) 3.5,53.5 6.8,56.8 v1(11.725,56.8)
  Bottom Layer w1.8: XP3.6@33.95,14.73 33.95,12.15 35.3,10.8 80,10.8 91.65,22.45 91.65,26.926 91.6,26.976 91.6,29.926 91.6,41.74 88.771,44.57 XP6.30@88.27,44.57
+16В_АКБ1: VT1_1.5 VT1_1.6 VT1_1.7 VT1_1.8 VT1_2.5 VT1_2.6 VT1_2.7 VT1_2.8 VT2_1.5 VT2_1.6 VT2_1.7 VT2_1.8 VT2_2.5 VT2_2.6 VT2_2.7 VT2_2.8 VT3.6 VT5.1 VT5.2 VT5.3 XP3.10 XP4.P | length 86.6
  Top Layer w0.35: v1(4.525,57.825) 4.55,57.8 VT3.6@5.8,57.8
  Layer 1 w0.35: v1(4.525,57.825) 4.525,36.275 12.1,28.7 12.1,26.8 26.4,12.5 36.773,12.5 XP3.10@39.003,14.73
  Bottom Layer w0.35: v1(4.525,57.825) 8.9,62.2 14.7,62.2 XP4.P@18.5,66
  other v1: 17.4,59.4 19,59.4 20.6,59.4 22.2,59.4 23.8,59.4 25.4,59.4 27,59.4 28.6,59.4 30.2,59.4 31.8,59.4 65.4,59.4 67,59.4 15,61 16.6,61 18.2,61 19.8,61 21.4,61 23,61 24.6,61 26.2,61 27.8,61 29.4,61 39,61 40.6,61 42.2,61 43.8,61 45.4,61 47,61 48.6,61 50.2,61 51.8,61 53.4,61 55,61 56.6,61 63,61 64.6,61 66.2,61 67.8,61 23.8,62.6 25.4,62.6 27,62.6 28.6,62.6 30.2,62.6 39.8,62.6 41.4,62.6 43,62.6 44.6,62.6 46.2,62.6 47.8,62.6 49.4,62.6 51,62.6 52.6,62.6 54.2,62.6 55.8,62.6 63.8,62.6 65.4,62.6 67,62.6 68.6,62.6 24.6,64.2 26.2,64.2 27.8,64.2 29.4,64.2 37.4,64.2 39,64.2 40.6,64.2 42.2,64.2 43.8,64.2 45.4,64.2 47,64.2 48.6,64.2 50.2,64.2 51.8,64.2 53.4,64.2 61.4,64.2 63,64.2 64.6,64.2 66.2,64.2 67.8,64.2 69.4,64.2 23.8,65.8 25.4,65.8 27,65.8 24.6,67.4 26.2,67.4 40.6,67.4 42.2,67.4 43.8,67.4 45.4,67.4 47,67.4 48.6,67.4 50.2,67.4 51.8,67.4 53.4,67.4 55,67.4 56.6,67.4 64.6,67.4 66.2,67.4 67.8,67.4 69.4,67.4 23.8,69 46.2,69 47.8,69 49.4,69 51,69 34.2,70.6 45.4,70.6 47,70.6 48.6,70.6 50.2,70.6 69.4,70.6 38.2,72.2 46.2,72.2 47.8,72.2 49.4,72.2 51,72.2 62.2,72.2
+16В_АКБ2: VT1_3.5 VT1_3.6 VT1_3.7 VT1_3.8 VT1_4.5 VT1_4.6 VT1_4.7 VT1_4.8 VT1_5.5 VT1_5.6 VT1_5.7 VT1_5.8 VT2_3.5 VT2_3.6 VT2_3.7 VT2_3.8 VT2_4.5 VT2_4.6 VT2_4.7 VT2_4.8 VT2_5.5 VT2_5.6 VT2_5.7 VT2_5.8 VT4.6 VT6.1 VT6.2 VT6.3 XP3.9 XP5.P | length 66.8
  Top Layer w0.35: VT4.6@12.7,59.2 13.682,59.2 17.4,55.482 v1(17.4,54.6)
  Layer 1 w0.35: v1(8.2,43.5) 8.2,34.5 13.2,29.5 13.2,27.8 21.8,19.2 37.1,19.2 XP3.9@39.03,17.27
  Bottom Layer w0.35: v1(8.2,43.5) 15,43.5 XP5.P@18.5,47
  other v1: 15.8,41.8 17.4,41.8 19,41.8 20.6,41.8 22.2,41.8 24.6,43.4 23.8,45 25.4,45 24.6,46.6 26.2,46.6 37.4,46.6 39,46.6 47,46.6 48.6,46.6 50.2,46.6 61.4,46.6 63,46.6 71,46.6 72.6,46.6 74.2,46.6 23.8,48.2 25.4,48.2 46.2,48.2 47.8,48.2 49.4,48.2 70.2,48.2 71.8,48.2 73.4,48.2 24.6,49.8 26.2,49.8 45.4,49.8 47,49.8 48.6,49.8 50.2,49.8 69.4,49.8 71,49.8 72.6,49.8 74.2,49.8 23.8,51.4 25.4,51.4 27,51.4 28.6,51.4 30.2,51.4 31.8,51.4 33.4,51.4 35,51.4 78.2,51.4 79.8,51.4 16.6,53 18.2,53 19.8,53 21.4,53 23,53 24.6,53 26.2,53 27.8,53 29.4,53 31,53 32.6,53 34.2,53 35.8,53 43.8,53 45.4,53 47,53 48.6,53 50.2,53 51.8,53 53.4,53 55,53 56.6,53 58.2,53 59.8,53 66.2,53 19,54.6 20.6,54.6 22.2,54.6 23.8,54.6 25.4,54.6 27,54.6 28.6,54.6 30.2,54.6 31.8,54.6 39.8,54.6 41.4,54.6 43,54.6 44.6,54.6 46.2,54.6 47.8,54.6 49.4,54.6 51,54.6 52.6,54.6 54.2,54.6 55.8,54.6 63.8,54.6 65.4,54.6 70.2,54.6 71.8,54.6 18.2,56.2 19.8,56.2 21.4,56.2 23,56.2 24.6,56.2 26.2,56.2 27.8,56.2 29.4,56.2 31,56.2 32.6,56.2 39,56.2 40.6,56.2 42.2,56.2 43.8,56.2 45.4,56.2 47,56.2 48.6,56.2 50.2,56.2 51.8,56.2 53.4,56.2 55,56.2 56.6,56.2 63,56.2 67.8,56.2 69.4,56.2 71,56.2 72.6,56.2 70.2,57.8 71.8,57.8 72.6,59.4 79,59.4 79.8,61 76.6,64.2 73.4,67.4 75,67.4 76.6,67.4 74.2,69 73.4,70.6 75,70.6
+35В: C1_1.2 C1_2.2 C1_3.2 C1_4.2 C1_5.2 DD1_1.6 DD1_2.6 DD1_3.6 DD1_4.6 DD1_5.6 XP6.1 XP6.2 | length 133.5
  Bottom Layer w0.35: 35.365,65.8 DD1_1.6@35.365,67.725 ; DD1_4.6@36.635,49.275 36.635,50.635 ; 59.365,66.115 DD1_2.6@59.365,67.725 ; DD1_5.6@60.635,49.275 60.635,51.135 ; 74.635,59.365 DD1_3.6@76.275,59.365 ; DD1_3.6@76.7,59.365 78.2,57.865 C1_3.2@78.2,56
  Bottom Layer w0.75: C1_1.2@32,65.8 35.365,65.8 C1_2.2@56,65.8 ; 36.635,50.635 37.2,51.2 C1_4.2@40,51.2 50.88,51.2 60.7,51.2 ; C1_2.2@56,66 59.25,66 ; 59.365,66.115 59.25,66 ; 60.635,51.135 60.7,51.2 ; 74.625,59.375 74.635,59.365 ; XP6.2@88.27,80.13 XP6.1@85.73,80.13 83.6,78 83.6,67.172 82.428,66 74.6,66 ; 59.25,66 74.6,66 ; 60.7,51.2 C1_5.2@64,51.2 73.609,51.2 74.6,52.191 74.6,66
button: DD2.2 R11.1 XP7.1 | length 10.5
  Top Layer w0.35: XP7.1@100.7,71 101.29,71 101.75,70.54 v1(101.75,69.5)
  Bottom Layer w0.35: DD2.2@97.135,65.025 97.135,65.865 97.545,66.275 99.825,66.275 R11.1@100,66.1 100.225,66.325 100.542,66.325 101.75,67.533 v1(101.75,69.5)
DSHOT1_1: XP1_1.2 XP3.13 | length 116.4
  Layer 1 w0.35: XP1_1.2@42,87 40.835,87 39.597,85.762 39.512,85.762 36,82.25 36,73.635 35.59,73.225 28.745,73.225 27.97,74 24.25,74 21.8,71.55 14.3,71.55 12.75,70 12.75,33.75 16.25,30.25 21.25,30.25 29.75,21.75 39.63,21.75 XP3.13@44.11,17.27
DSHOT1_2: XP1_2.2 XP3.27 | length 95.8
  Layer 1 w0.35: XP3.27@61.89,17.27 65.37,20.75 79,20.75 83,24.75 83,66 75.025,73.975 74.325,73.975 73.725,74.575 73.725,75.025 72.75,76 72.75,83.5 69.25,87 XP1_2.2@66,87